# EAGLE board Automatic irrigation system using Arduino (EAGLE 9.7.0)

Size 234.34 x 123.19 mm. Coordinates in mm from the lower left corner, seen from the top.
Outline: 0,0 234.34,0 234.34,123.19 0,123.19 0,0
Copper layers (1*16): Top 0.035mm / dielectric 1.5mm / Bottom 0.035mm
Design rules "default": minimum track width 6mil, minimum drill 0.35mm, track to track 6mil, track to pad 6mil, pad to pad 6mil, via to via 6mil, smd to smd 6mil, copper to edge 40mil, drill to drill 6mil, minimum pad ring 10mil, minimum via ring 8mil, stop-mask expansion 4mil, vias tented up to drill 0mil, thermal gap 10mil

## Footprints (pad centres in the part's own frame; a part is rotated, then mirrored left to right if it is on the bottom)
LEDRD254W60D565H860B = drill 0.981 pad 1.581: 1 -1.27,0; 2 1.27,0
LEDRD254W60D565H860B_G = drill 0.981 pad 1.581: 1 -1.27,0; 2 1.27,0
MOTOR = drill 1.118 pad 3.15 octagon: + 2.54,0; - -2.54,0
RESAD1016W63L850D250B = drill 0.83 pad 1.43: 1 -5.08,0; 2 5.08,0
1X03 = drill 1.016 long: 1 -2.54,0; 2 0,0; 3 2.54,0
SEN-13322 = drill 1.016 long: 1 -2.54,0; 2 0,0; 3 2.54,0
TO92 = drill 0.813 octagon: 1 -1.27,0; 2 0,1.905; 3 1.27,0
ARDUINO-UNO-R3-SHIELD = drill 1.016 pad 1.88: 3.3V 24.13,-2.54; 5V 24.13,0; A0 24.13,12.7; A1 24.13,15.24; A2 24.13,17.78; A3 24.13,20.32; A4 24.13,22.86; A5 24.13,25.4; AREF -24.13,-13.97; D2 -24.13,20.32; D3 -24.13,17.78; D4 -24.13,15.24; D5 -24.13,12.7; D6 -24.13,10.16; D7 -24.13,7.62; D8 -24.13,3.81; D9 -24.13,1.27; D10 -24.13,-1.27; D11 -24.13,-3.81; D12 -24.13,-6.35; D13 -24.13,-8.89; GND@0 24.13,2.54; GND@1 24.13,5.08; GND@2 -24.13,-11.43; IOREF 24.13,-7.62; NC 24.13,-10.16; RES 24.13,-5.08; RX -24.13,25.4; SCL -24.13,-19.05; SDA -24.13,-16.51; TX -24.13,22.86; VIN 24.13,7.62
JHD-162A = drill 1.016 long: 1 -19.05,0; 2 -16.51,0; 3 -13.97,0; 4 -11.43,0; 5 -8.89,0; 6 -6.35,0; 7 -3.81,0; 8 -1.27,0; 9 1.27,0; 10 3.81,0; 11 6.35,0; 12 8.89,0; 13 11.43,0; 14 13.97,0; 15 16.51,0; 16 19.05,0

## Placement (x,y rotation side)
DLED1  RED  [LEDRD254W60D565H860B]  135.59,29.29 180 top
DLED2  GREEN  [LEDRD254W60D565H860B_G]  140.67,29.29 180 top
MDC_MOTOR  MOTOR_HDR  [MOTOR]  137.28,80.67 0 top
R1  330  [RESAD1016W63L850D250B]  103.84,29.29 0 top
R2  RESISTOR_AXIAL-10.16MM-PITCH  [RESAD1016W63L850D250B]  134.32,44.53 90 top
R3  RESISTOR_AXIAL-10.16MM-PITCH  [RESAD1016W63L850D250B]  139.4,44.53 90 top
R5  200  [RESAD1016W63L850D250B]  190.2,8.97 90 top
RPOTENCIOMETER1  PINHD-1X03_1X03M  [1X03]  157.18,24.21 0 top
SEN1  SEN-13322  [SEN-13322]  6.99,32.26 0 top
TT-NPN_(BJT)  NPN  [TO92]  108.92,34.37 0 top
UARDUINO_UNO  ARDUINO-UNO-R3-SHIELD  [ARDUINO-UNO-R3-SHIELD]  85.23,93.34 270 top
ULCD1  LCD-16X2JHD-162A  [JHD-162A]  178.71,107.64 0 top
USENSOR_LM35  PINHD-1X03_1X03M  [1X03]  68.28,29.29 0 top

## Library data of the parts
DLED1 = Tinkercad; CATEGORY: Opto-Electronic; SUB-CATEGORY: LED; VALUE: LED_RED
DLED2 = Tinkercad; CATEGORY: Opto-Electronic; SUB-CATEGORY: LED; VALUE: LED_GREEN
MDC_MOTOR R1-R3 R5 RPOTENCIOMETER1 SEN1 UARDUINO_UNO ULCD1 USENSOR_LM35 = Tinkercad
TT-NPN_(BJT) = Tinkercad; CATEGORY: Transistor; SUB-CATEGORY: BJT; TYPE: NPN

## Nets
MDC_MOTOR_+: MDC_MOTOR.+ TT-NPN_(BJT).3
TT-NPN_(BJT)_B: R1.2 TT-NPN_(BJT).2
UARDUINO_UNO_3.3V: SEN1.1 UARDUINO_UNO.3.3V
UARDUINO_UNO_5V: RPOTENCIOMETER1.1 TT-NPN_(BJT).1 UARDUINO_UNO.5V ULCD1.2 ULCD1.15 USENSOR_LM35.3
UARDUINO_UNO_A0: UARDUINO_UNO.A0 USENSOR_LM35.1
UARDUINO_UNO_A1: SEN1.3 UARDUINO_UNO.A1
UARDUINO_UNO_D2: UARDUINO_UNO.D2 ULCD1.4
UARDUINO_UNO_D3: UARDUINO_UNO.D3 ULCD1.6
UARDUINO_UNO_D4: UARDUINO_UNO.D4 ULCD1.11
UARDUINO_UNO_D5: UARDUINO_UNO.D5 ULCD1.12
UARDUINO_UNO_D6: UARDUINO_UNO.D6 ULCD1.13
UARDUINO_UNO_D7: UARDUINO_UNO.D7 ULCD1.14
UARDUINO_UNO_D13: R1.1 UARDUINO_UNO.D13
UARDUINO_UNO_GND: MDC_MOTOR.- R2.2 R3.2 R5.1 RPOTENCIOMETER1.3 SEN1.2 UARDUINO_UNO.GND@0 UARDUINO_UNO.GND@1 UARDUINO_UNO.GND@2 ULCD1.1 ULCD1.5 USENSOR_LM35.2
ULCD1_LED-: R5.2 ULCD1.16
ULCD1_VO: RPOTENCIOMETER1.2 ULCD1.3

## Tracks (layer width: path | path; a pad name or v marks a point on that pad's centre or on a via)
MDC_MOTOR_+  (1 unrouted)
TT-NPN_(BJT)_B  (1 unrouted)
UARDUINO_UNO_3.3V  (1 unrouted)
UARDUINO_UNO_5V  (5 unrouted)
UARDUINO_UNO_A0  (1 unrouted)
UARDUINO_UNO_A1  (1 unrouted)
UARDUINO_UNO_D2  (1 unrouted)
UARDUINO_UNO_D3  (1 unrouted)
UARDUINO_UNO_D4  (1 unrouted)
UARDUINO_UNO_D5  (1 unrouted)
UARDUINO_UNO_D6  (1 unrouted)
UARDUINO_UNO_D7  (1 unrouted)
UARDUINO_UNO_D13  (1 unrouted)
UARDUINO_UNO_GND  (11 unrouted)
ULCD1_LED-  (1 unrouted)
ULCD1_VO  (1 unrouted)